# Altium PCB PCB_WashVer2.PcbDoc
Units mm, origin at the board's own origin, x right, y up, seen from the top; angles counter-clockwise.
Board outline 148 x 116 mm, 2 copper layers (Top Layer, Bottom Layer); 83 components, 92 nets, 296 pads, 72 vias.
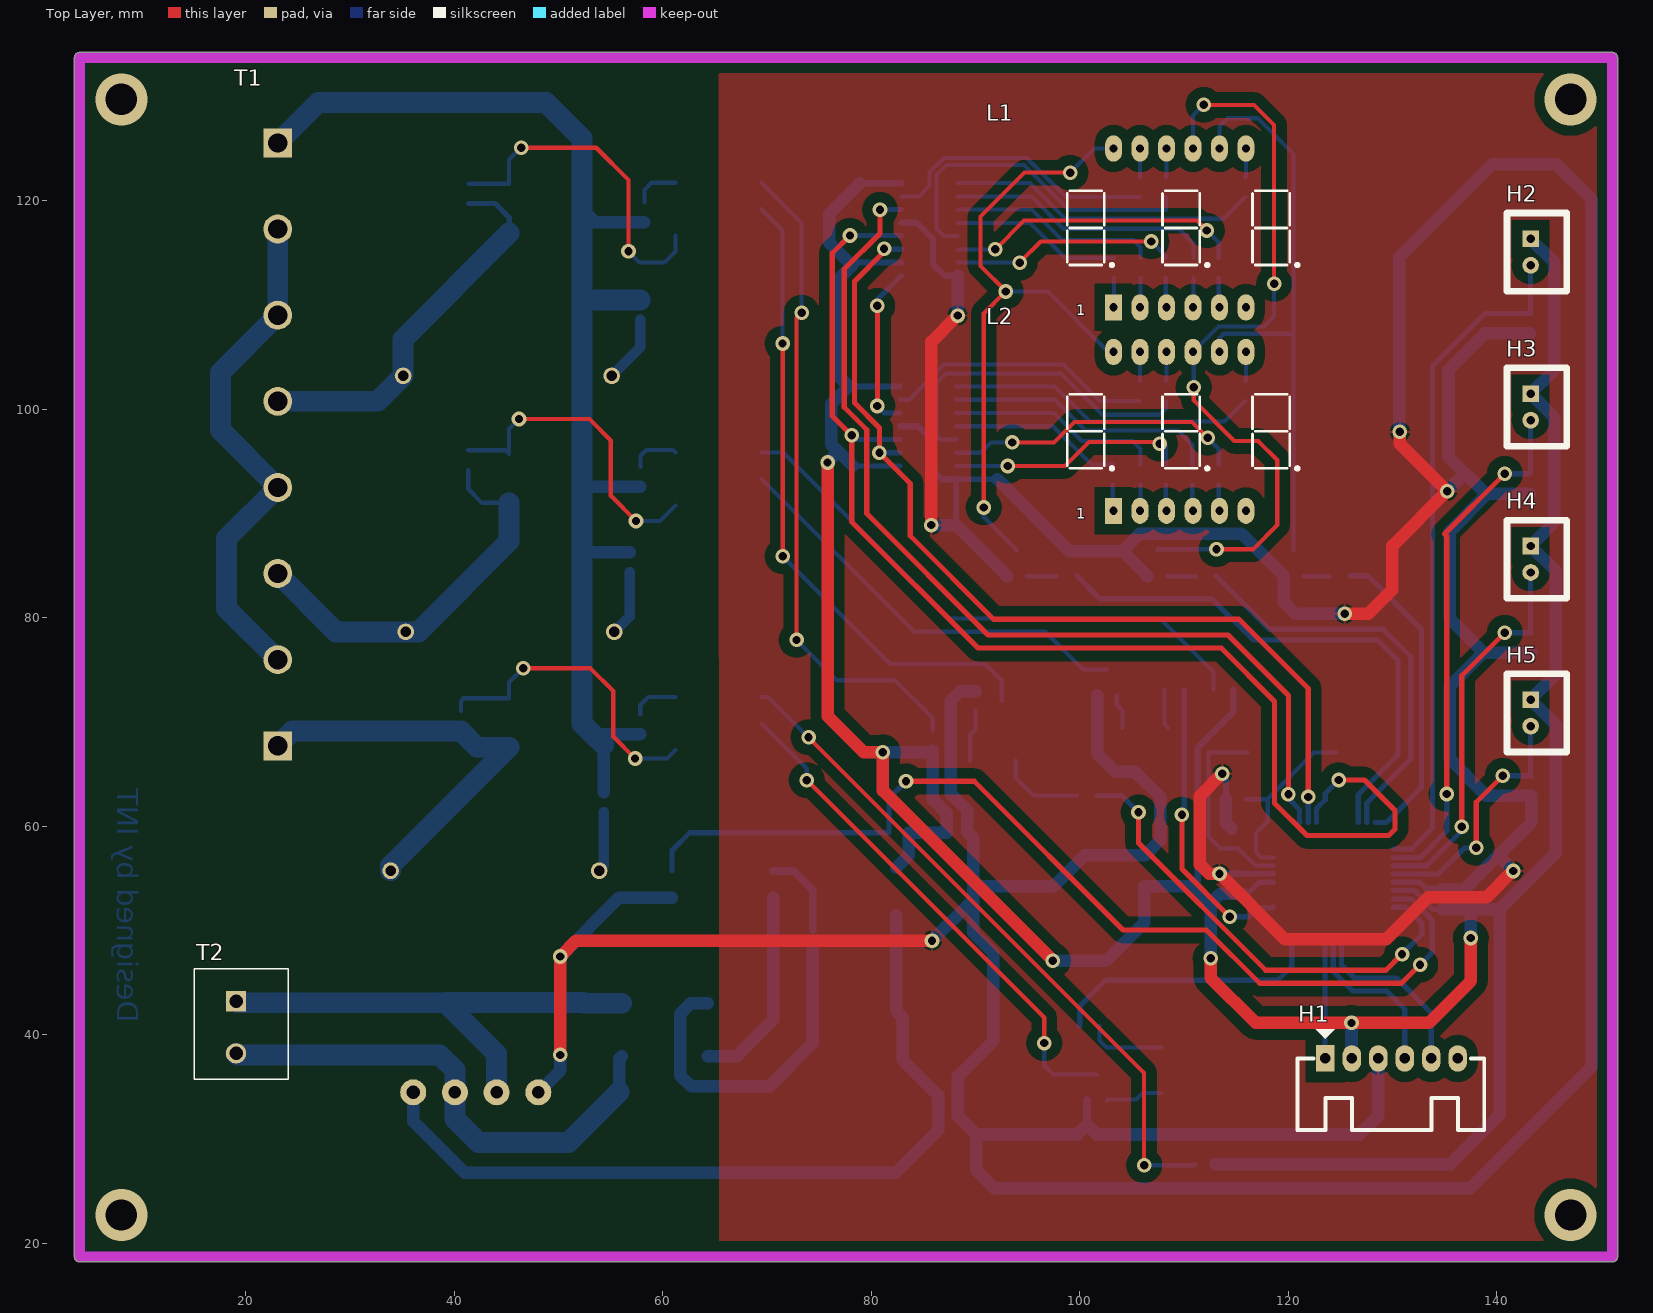
[diagram p0: Top Layer view]
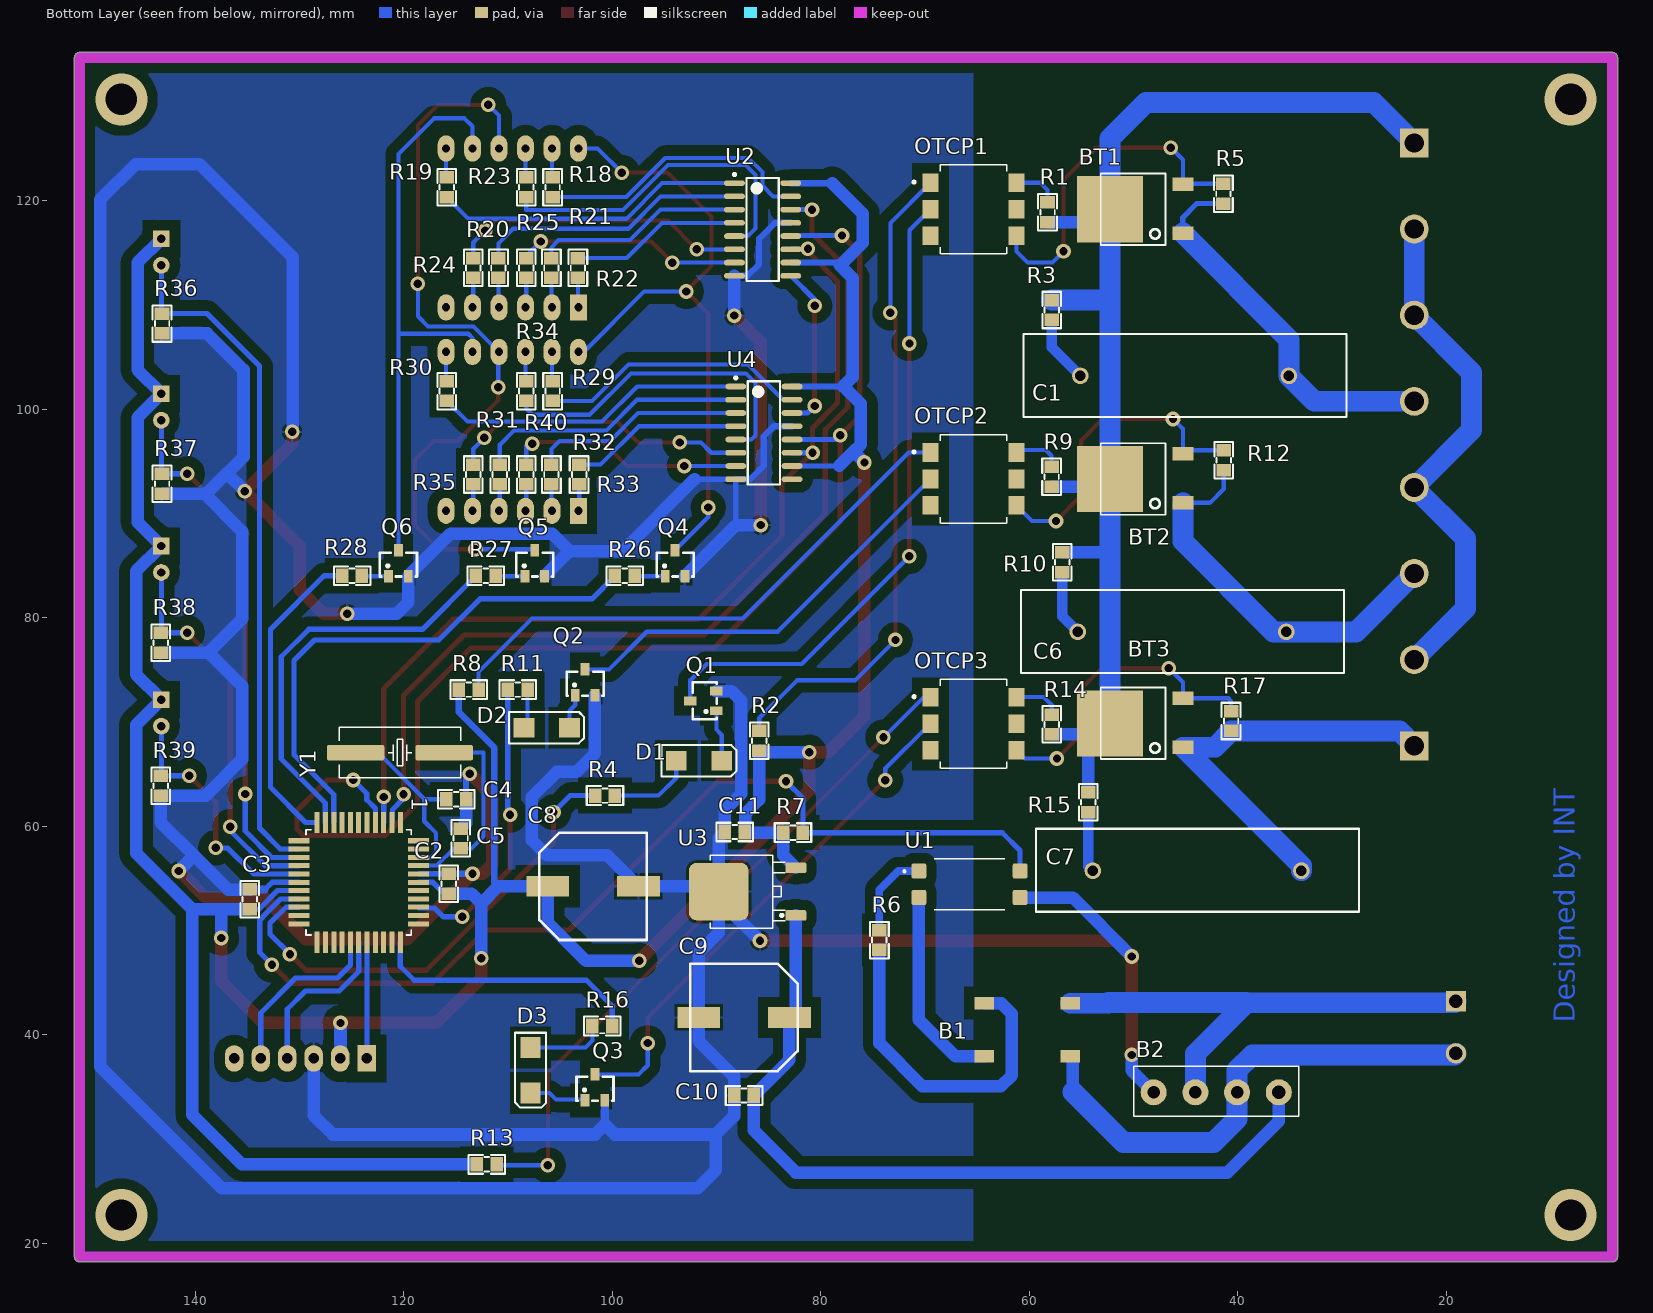
[diagram p1: Bottom Layer view, seen from below]

## Layer stack, top to bottom
Top Solder: solder mask 0.0102, Solder Resist, Dk 3.5
Top Layer: signal copper 0.0356
Dielectric 1: dielectric 0.32, FR-4, Dk 4.8
Bottom Layer: signal copper 0.0356
Bottom Solder: solder mask 0.0102, Solder Resist, Dk 3.5

## Board outline
3.58,18.7 3.58,133.7 cw(c4.08,133.7) 4.08,134.2 151.08,134.2 cw(c151.08,133.7) 151.58,133.7 151.58,18.7 cw(c151.08,18.7) 151.08,18.2 4.08,18.2 cw(c4.08,18.7)

## Design rules (kind name [scope] priority, off if disabled: settings)
Clearance Clearance_Mass [All vs InPolygon] p1: gap=1 ignorepadtopadclearanceinfootprint=FALSE
Clearance [All] p2: gap=0.26 ignorepadtopadclearanceinfootprint=FALSE
PolygonConnect [All] p1: connectstyle=Relief reliefconductorwidth=0.254 reliefentries=4 polygonreliefangle="90 Angle" airgapwidth=0.254
RoutingVias [InNetClass('PowerAC')] p1: holewidth=0.6 width=1 viastyle="Through Hole" minholewidth=0.6 minwidth=1 maxholewidth=0.6 maxwidth=1
SilkToSilkClearance [IsText] p1: silktosilkclearance=0.254
SolderMaskExpansion [All] p1: expansion=0.102
Width Width_AC [InNetClass('PowerAC')] p1: maxlimit=2 minlimit=0.5 preferedwidth=1.2
Width Width_DC [InNetClass('PowerDC')] p2: maxlimit=1.2 minlimit=0.5 preferedwidth=0.75
Width Width_Signal [InNetClass('Signal')] p3: maxlimit=0.5 minlimit=0.5 preferedwidth=0.5
Width Width_All [All] p4: maxlimit=2 minlimit=0.4 preferedwidth=1
29 further rules are at their usual default settings.

## Components (designator, comment, footprint, x,y, rotation, side; value= is the part's Value field where it differs from the comment)
1 "PIC16F887-I/PT" QFP80P1200X1200X120-44N 124.317,54.605 r180 bottom
B1 "BridgeDiode" DIOB_DB107S 60.195,40.465 r90 bottom
B2 "BridgeDiode" KBP310 42.07,34.465 r0 bottom
BT1 "BT137S-600E" TO252_NEW 48.765,119.225 r90 bottom
BT2 "BT137S-600E" TO252_NEW 48.765,93.355 r90 bottom
BT3 "BT137S-600E" TO252_NEW 48.765,69.915 r90 bottom
C1 "Tu keo 100nF 2000V" "TU KEO 25MM" 55.1,103.18 r180 bottom
C2 "104" "tu 0805" 115.681,54.478 r90 bottom
C3 "104" "tu 0805" 134.763,52.97 r90 bottom
C4 "22pF" "tu 0805" 114.963,62.57 r0 bottom
C5 "22pF" "tu 0805" 114.538,58.82 r270 bottom
C6 "Tu keo 100nF 2000V" "TU KEO 25MM" 55.35,78.63 r180 bottom
C7 "Tu keo 100nF 2000V" "TU KEO 25MM" 53.9,55.72 r180 bottom
C8 "1000uF" "tu nhom 10 (G)" 101.838,54.224 r180 bottom
C9 "1000uF" "tu nhom 10 (G)" 87.36,41.651 r0 bottom
C10 "104" "tu 0805" 87.36,34.158 r0 bottom
C11 "104" "tu 0805" 88.249,59.431 r0 bottom
D1 "SS14" "DIODE SMD" 91.678,66.162 r0 bottom
D2 "SS14" "DIODE SMD" 106.283,69.337 r0 bottom
D3 "SS14" "DIODE SMD" 107.934,36.571 r90 bottom
H1 "Header 6P 2.54 Duc Cong" "Header 6P DC 2.54" 123.555,37.714 r270 top
H2 "Header 2P 2.54 Duc Thang" XH2.54M-2 143.24,116.327 r270 top
H3 "Header 2P 2.54 Duc Thang" XH2.54M-2 143.24,101.468 r270 top
H4 "Header 2P 2.54 Duc Thang" XH2.54M-2 143.24,86.863 r270 top
H5 "Header 2P 2.54 Duc Thang" XH2.54M-2 143.24,72.131 r270 top
L1 "7SEG3DIG_0.56INCH" 7SEG_3DIGIT_0.56INCH 90.789,107.868 r0 top
L2 "7SEG3DIG_0.56INCH" 7SEG_3DIGIT_0.56INCH 90.789,88.36 r0 top
OTCP1 "OptoCouple" OPTOCOUPLER_H11F3SR2M 65.354,119.162 r180 bottom
OTCP2 "OptoCouple" OPTOCOUPLER_H11F3SR2M 65.354,93.291 r180 bottom
OTCP3 "OptoCouple" OPTOCOUPLER_H11F3SR2M 65.354,69.809 r180 bottom
Q1 "C1815" SOT23B 91.135,72.14 r90 bottom
Q2 "C1815" SOT23B 102.473,73.655 r180 bottom
Q3 "C1815" SOT23B 101.53,34.81 r180 bottom
Q4 "C1815" SOT23B 93.837,85.082 r180 bottom
Q5 "C1815" SOT23B 107.299,85.082 r180 bottom
Q6 "C1815" SOT23B 120.38,85.082 r180 bottom
R1 "330R" "Tro SMD 0805" 58.19,118.87 r270 bottom
R2 "470R" "Tro SMD 0805" 85.963,68.194 r90 bottom
R3 "390R" "Tro SMD 0805" 57.78,109.5 r270 bottom
R4 "680R" "tro smd 0805" 100.695,62.987 r180 bottom
R5 "330R" "Tro SMD 0805" 41.325,120.655 r270 bottom
R6 "220R" "tro smd 0805" 74.445,49.065 r90 bottom
R7 "1k" "tro smd 0805" 82.661,59.304 r0 bottom
R8 "470R" "Tro SMD 0805" 113.776,73.147 r180 bottom
R9 "330R" "Tro SMD 0805" 57.795,93.505 r270 bottom
R10 "390R" "Tro SMD 0805" 56.78,85.3 r270 bottom
R11 "680R" "tro smd 0805" 109.077,73.147 r180 bottom
R12 "330R" "Tro SMD 0805" 41.29,95.095 r270 bottom
R13 "470R" "Tro SMD 0805" 112.038,27.62 r180 bottom
R14 "330R" "Tro SMD 0805" 57.785,69.75 r270 bottom
R15 "390R" "Tro SMD 0805" 54.28,62.3 r270 bottom
R16 "680R" "tro smd 0805" 100.949,40.762 r0 bottom
R17 "330R" "Tro SMD 0805" 40.585,70.08 r270 bottom
R18 "100R" "tro smd 0805" 105.775,121.28 r90 bottom
R19 "100R" "tro smd 0805" 115.935,121.28 r90 bottom
R20 "100R" "tro smd 0805" 110.855,113.533 r270 bottom
R21 "100R" "tro smd 0805" 105.775,113.533 r270 bottom
R22 "100R" "tro smd 0805" 103.235,113.533 r270 bottom
R23 "100R" "tro smd 0805" 108.315,121.28 r90 bottom
R24 "100R" "tro smd 0805" 113.268,113.533 r270 bottom
R25 "100R" "tro smd 0805" 108.188,113.533 r270 bottom
R26 "1k" "tro smd 0805" 98.79,83.942 r0 bottom
R27 "1k" "tro smd 0805" 112.125,83.942 r0 bottom
R28 "1k" "tro smd 0805" 124.952,83.942 r0 bottom
R29 "100R" "tro smd 0805" 105.775,101.722 r90 bottom
R30 "100R" "tro smd 0805" 115.935,101.722 r90 bottom
R31 "100R" "tro smd 0805" 110.728,93.721 r270 bottom
R32 "100R" "tro smd 0805" 105.775,93.721 r270 bottom
R33 "100R" "tro smd 0805" 103.108,93.721 r270 bottom
R34 "100R" "tro smd 0805" 108.315,101.722 r90 bottom
R35 "100R" "tro smd 0805" 113.268,93.721 r270 bottom
R36 "1k" "tro smd 0805" 143.24,108.199 r90 bottom
R37 "1k" "tro smd 0805" 143.24,92.832 r90 bottom
R38 "1k" "tro smd 0805" 143.367,77.592 r90 bottom
R39 "1k" "tro smd 0805" 143.367,63.876 r90 bottom
R40 "100R" "tro smd 0805" 108.188,93.721 r270 bottom
T1 "CON-8" TER_8P_8.25 27.605,130.366 r270 top
T2 "12VAC" CON_2P_5mm 19.08,40.7 r270 top
U1 "EL817S(D)(TU)" SOIC254P1030X460-4N 65.735,54.415 r180 bottom
U2 "74HC595" "sop 16" 85.582,117.22 r180 bottom
U3 "78M05 SMD TO252" TO252 86.09,53.716 r90 bottom
U4 "74HC595" "sop 16" 85.455,97.712 r180 bottom
Y1 "16Mhz" "Thach Anh 2 chan SMD" 120.363,67.045 r0 bottom value=4Mhz

## Footprints (in the part's own frame and the unit in brackets; to place one, negate y for a bottom-side part, rotate by r counter-clockwise, add the part's x,y. Pads: shape width x height; smd on the part's side, far side on the other; paste and mask are expansions set on the pad)
7SEG_3DIGIT_0.56INCH [mm]
  rect 1.6x2.5 hole 0.8: 1(12.45,1.88)
  oval 1.6x2.5 hole 0.8: 2(14.99,1.88) 3(17.53,1.88) 4(20.07,1.88) 5(22.61,1.88) 6(25.15,1.88) 7(25.15,17.12) 8(22.61,17.12) 9(20.07,17.12) 10(17.53,17.12) 11(14.99,17.12) 12(12.45,17.12)
  silkscreen extent 8,5.79 30.23,13.06, body extent -0.01,0 37.59,19, height 8.05
CON_2P_5mm [mm]
  rect 1.95x1.95 hole 1.3: 1(-2.5,0)
  round 1.95 hole 1.3: 2(2.5,0)
  silkscreen extent -5.6,-4 5,5, body extent -5.6,-3.93 5,5.07, height 12.6
DIOB_DB107S [mm]
  rect 1.2x1.9 smd: +(2.55,4.126) -(-2.55,4.126) ~(2.55,-4.124) ~.(-2.55,-4.124)
  body extent -4.16,-5.2 4.16,5.2, height 2.58
"DIODE SMD" [mm]
  rect 2x1.9 smd: 1(2.184,-0.102) 2(-2.184,-0.102)
  silkscreen extent -3.58,-1.6 3.61,1.4, body extent -2.67,-1.5 2.82,1.3, height 2.3
"Header 6P DC 2.54" [mil]
  rect 100x70 hole 40: 1(0,0)
  oval 100x70 hole 40: 2(0,100) 3(0,200) 4(0,300) 5(0,400) 6(0,500)
  silkscreen extent -110,-105 270,600, body extent -7,-110 278,605, height 227
KBP310 [mm]
  round 2.5 hole 1.2: +(6,0) ~(-2,0) ~.(2,0)
  round 2.5 hole 1.3: -(-6,0)
  silkscreen extent -7.9,-2.5 7.9,2.3
OPTOCOUPLER_H11F3SR2M [mm]
  rect 1.52x1.78 smd: 1(-4.125,2.54) 2(-4.125,0) 3(-4.125,-2.54) 4(4.125,-2.54) 5(4.125,0) 6(4.125,2.54)
  silkscreen extent -5.8,-4.26 3.18,4.26, body extent -4.59,-4.25 4.58,4.26, height 4.94
QFP80P1200X1200X120-44N [mil]
  rect 80x19 smd: 1(-226,157) 2(-226,126) 3(-226,94) 4(-226,63) 5(-226,31) 6(-226,0) 7(-226,-31) 8(-226,-63) 9(-226,-94) 10(-226,-126) 11(-226,-157) 23(226,-157) 24(226,-126) 25(226,-94) 26(226,-63) 27(226,-31) 28(226,0) 29(226,31) 30(226,63) 31(226,94) 32(226,126) 33(226,157)
  rect 19x80 smd: 12(-157,-226) 13(-126,-226) 14(-94,-226) 15(-63,-226) 16(-31,-226) 17(0,-226) 18(31,-226) 19(63,-226) 20(94,-226) 21(126,-226) 22(157,-226) 34(157,226) 35(126,226) 36(94,226) 37(63,226) 38(31,226) 39(0,226) 40(-31,226) 41(-63,226) 42(-94,226) 43(-126,226) 44(-157,226)
  silkscreen extent -199,-199 199,199, body extent -236,-236 236,236, height 43
SOIC254P1030X460-4N [mm]
  rrect25% 1.41x1.47 smd: 1(-4.85,1.27) 2(-4.85,-1.27) 3(4.85,-1.27) 4(4.85,1.27)
  silkscreen extent -6.35,-2.44 3.4,2.44, body extent -5.08,-2.29 5.08,2.29, height 4.43
"sop 16" [mm] "SOIC, 16-Leads, Body 9.90x3.91mm, Pitch 1.27mm, IPC Medium Density"
  oval 2x0.55 smd: 1(-2.7,4.445) 2(-2.7,3.175) 3(-2.7,1.905) 4(-2.7,0.635) 5(-2.7,-0.635) 6(-2.7,-1.905) 7(-2.7,-3.175) 8(-2.7,-4.445) 9(2.7,-4.445) 10(2.7,-3.175) 11(2.7,-1.905) 12(2.7,-0.635) 13(2.7,0.635) 14(2.7,1.905) 15(2.7,3.175) 16(2.7,4.445)
  silkscreen extent -2.83,-4.95 1.55,5.39, body extent -3,-4.95 3,4.95, height 1.4
SOT23B [mm] "SOT 23B"
  rect 0.85x1.2 smd: 1(-1.077,-1.123) 2(0.813,-1.118) 3(-0.127,1.377)
  silkscreen extent -1.91,-1.14 1.65,1.14, body extent -1.63,-1.17 1.37,1.33, height 1.06
TER_8P_8.25 [mm]
  rect 2.775x2.775 hole 1.85: 1(4.846,-4.525) 8(62.666,-4.525)
  round 2.775 hole 1.85: 2(13.106,-4.525) 3(21.366,-4.525) 4(29.626,-4.525) 5(37.886,-4.525) 6(46.146,-4.525) 7(54.406,-4.525)
  body extent -0.43,-14.84 67.33,0.4, height 11.43
"Thach Anh 2 chan SMD" [mm] "SMD Crystal HC49/US-SM package"
  round 0.508 on Mech15: 0(0,0)
  rrect25% 5.5x1.5 smd: 1(-4.25,0) 2(4.25,0)
  silkscreen extent -5.84,-2.41 5.84,2.41, body extent -6.4,-2.41 6.4,2.42, height 4.29
TO252 [mm] "TO252"
  round 0.5 on Mech15: 0(0,0)
  rrect25% 1x2 smd: 1(-2.285,-3.7) 3(2.285,-3.7)
  rrect25% 5.5x5.7 smd: 2(0,3.7)
  silkscreen extent -3.5,-2.7 3.5,4.5, body extent -3.3,-3.95 3.3,5.76, height 2.31
TO252_NEW [mil]
  rect 51.18x78.74 smd: 1(-92.5,-137.5) 3(92.5,-137.5)
  rect 250x250 smd: 2(-2.5,137.5)
  silkscreen extent -138,-73 132,172, body extent -132,-163 127,219, height 91
"Tro SMD 0805" [mm]
  rect 1.2x1.4 smd: 1(-0.946,-0.061) 2(0.954,-0.061)
  silkscreen extent -1.75,-0.97 1.75,0.84, body extent -1.56,-0.76 1.44,0.64, height 0.53
"tro smd 0805" [mm]
  rect 1.2x1.4 smd: 1(-0.946,-0.061) 2(0.954,-0.061)
  silkscreen extent -1.75,-0.97 1.75,0.84, body extent -1.56,-0.76 1.44,0.64, height 0.53
"tu 0805" [mm] "Compoment SMD 80x50mil"
  rect 1.2x1.4 smd: 1(-0.946,-0.003) 2(0.954,-0.003)
  silkscreen extent -1.75,-0.89 1.75,0.89, body extent -1.01,-0.64 1.01,0.63, height 0.61
"TU KEO 25MM" [mm]
  round 1.6 hole 1: 1(0,0) 2(20,0)
  silkscreen extent -5.46,-3.94 25.53,4.02, body extent -5.47,-3.96 25.53,4.04, height 22.5
"tu nhom 10 (G)" [mm]
  rect 4.1x2 smd: 1(-4.35,0) 2(4.35,0)
  silkscreen extent -5.15,-5.15 5.15,5.15, body extent -5.9,-5.25 5.9,5.25, height 10.5
XH2.54M-2 [mm]
  rect 1.6x1.6 hole 0.8: 1(0,0)
  round 1.6 hole 0.8: 2(2.54,0)
  silkscreen extent -2.48,-2.26 5.02,3.46, body extent -2.48,-2.26 5.02,3.48, height 6.91

## Part data
1: "PIC PIC® 16F Microcontroller IC 8-Bit 20MHz 14KB _8K x 14_ FLASH 44-TQFP _10x10_", Package="TQFP-44 Microchip", Availability=Unavailable, MF=Microchip, MP=PIC16F887-I/PT, Price=None, SnapEDA_Link=https://www.snapeda.com/parts/PIC16F887-I/PT/Microchip/view-part/5739/?ref=snap
B1 B2: library part DIOB_Bridge
BT1 BT2 BT3: library part BT137, "Dán", Chung_Loai=Dán, Don_Vi=Con, Ma_Hang=MH005450, Ten_Linh_Kien="BT137S-600E TO252 TRIAC 8A 600V"
C2 C3 C10 C11: library part "Tu 0805 104 50V 10%", "Dán", Chung_Loai=Dán, Don_Vi=Con, Ma_Hang=MH004551, So_Chan=2, Ten_Linh_Kien="T? 0805 104-100nF 10% 50V"
C4 C5: library part "Tu 0805 22pF 50V 10%", "Dán", Chung_Loai=Dán, Don_Vi=Con, Ma_Hang=MH004560, So_Chan=2, Ten_Linh_Kien="T? 0805 22P 10% 50V"
C8 C9: library part "Tu Nhom 1000uF 16V", "Dán", Chung_Loai=Dán, Don_Vi=Con, Ma_Hang=MH004419, So_Chan=2, Ten_Linh_Kien="T? Nhôm 1000uF 16V 10x10MM"
D1 D2 D3: library part "Diode SS14 ( 1N5819)", "Dán", Chung_Loai=Dán, Don_Vi=Con, Ma_Hang=MH002211, Ten_Linh_Kien="Diode SS14 DO214 Schottky 1A 40V ( 1N5819 DO214)"
H1 H2 H3 H4 H5: "C?m", Chung_Loai=C?m, Don_Vi=Con
  H1: Ma_Hang=MH003363, Ten_Linh_Kien="Header 6P XH2.54-6P Ð?c Cong"
  H2 H3 H4 H5: Ma_Hang=MH001283, Ten_Linh_Kien="Header 2P XH2.54-2P Ð?c Th?ng"
OTCP1 OTCP2 OTCP3: library part MOC3020SM
Q1 Q2 Q3 Q4 Q5 Q6 U2 U3 U4: "Dán", Chung_Loai=Dán, Don_Vi=Con
  Q1 Q2 Q3 Q4 Q5 Q6: Ma_Hang=MH000946, Ten_Linh_Kien="C1815 SOT23 TRANS NPN 0.15A 50V (SMD-HF)"
  U2 U4: Ma_Hang=MH000672, Ten_Linh_Kien="74HC595D SOP16"
  U3: Ma_Hang=MH001917, Ten_Linh_Kien="78M05 TO252"
R1 R5 R9 R12 R14 R17: library part "Tro 0805 5% 330R", "Dán", Chung_Loai=Dán, Don_Vi=Con, Ma_Hang=MH005337, So_Chan=2, Ten_Linh_Kien="Tr? 0805 5% 330R"
R2 R8 R13: library part "Tro 0805 5% 470R", "Dán", Chung_Loai=Dán, Don_Vi=Con, Ma_Hang=MH005341, So_Chan=2, Ten_Linh_Kien="Tr? 0805 5% 470R"
R3 R10 R15: library part "Tro 0805 5% 390R", "Dán", Chung_Loai=Dán, Don_Vi=Con, Ma_Hang=MH005339, So_Chan=2, Ten_Linh_Kien="Tr? 0805 5% 390R"
R4 R11 R16: library part "Tro 0805 1% 680R", "Dán", Chung_Loai=Dán, Don_Vi=Con, Ma_Hang=MH005487, So_Chan=2, Ten_Linh_Kien="Tr? 0805 1% 680R"
R6: library part "Tro 0805 5% 220R", "Dán", Chung_Loai=Dán, Don_Vi=Con, Ma_Hang=MH005259, So_Chan=2, Ten_Linh_Kien="Tr? 0805 5% 220R"
R7 R26 R27 R28 R36 R37 R38 R39: library part "Tro 0805 1% 1k", "Dán", Chung_Loai=Dán, Don_Vi=Con, Ma_Hang=MH005468, So_Chan=2, Ten_Linh_Kien="Tr? 0805 1% 1k"
R18 R19 R20 R21 R22 R23 R24 R25 R29 R30 R31 R32 R33 R34 R35 R40: library part "Tro 0805 5% 100R", "Dán", Chung_Loai=Dán, Don_Vi=Con, Ma_Hang=MH005251, So_Chan=2, Ten_Linh_Kien="Tr? 0805 5% 100R"
T2: library part CONNECT
U1: "Optoisolator Transistor Output 5000Vrms 1 Channel 4-SMD", Package="SMD-4 Everlight Electronics", Availability=Unavailable, MF="Everlight Electronics", MP=EL817S_D__TU_, Price=None, SnapEDA_Link=https://www.snapeda.com/parts/EL817S_D__TU_/Everlight%20Electronics%20Co%20Ltd/view-part/1118456/?ref=snap
Y1: library part "Thach Anh 2 chan SMD", "Crystal For all Crystal 2pin."

## Via types
v1: diameter 1.4, hole 0.8, Top Layer to Bottom Layer, 68 vias
v2: diameter 5, hole 3, Top Layer to Bottom Layer, 4 vias

## Nets (pads, with @x,y where several pads share a name; then routed paths per layer and width w, separated by ;. In a path a pad name is that pad's centre, name@x,y a point inside that pad or via, vN(x,y) a via of type N, cw(c..) or ccw(c..) an arc to the next point about the centre after c; other vN are vias at no path point)
5V: 1.7 1.28 C2.1 C3.1 C8.1 C11.1 H1.2 H2.1 H3.1 H4.1 H5.1 R2.1 R7.2 R8.1 R13.1 U2.10 U2.16 U3.3 U4.10 U4.16 | length 364.5
  Top Layer w1.2: v1(75.813,94.87) 75.813,70.545 79.263,67.095 v1(81.113,67.095) 81.113,63.395 v1(97.413,47.095) ; v1(112.563,47.32) 112.563,45.445 116.888,41.12 v1(126.063,41.12) 133.488,41.12 137.513,45.145 v1(137.513,49.27)
  Bottom Layer w0.5: 78.246,94.537 U4.10 ; C2.1 116.132,53.532 117.205,54.605 1.28 ; 1.7 132.09,53.818 133.9,52.008 C3.1@134.744,52.008
  Bottom Layer w0.6: 77.825,102.158 77.85,102.158 U4.16 ; 78.443,114.05 U2.10@82.882,114.05 ; 78.908,121.665 U2.16 ; R2.1@85.749,67.095 R2.1 ; 110.934,54.224 111.313,54.603 111.313,67.536 114.722,70.945 R8.1
  Bottom Layer w0.75: 140.246,52.024 145.653,57.431
  Bottom Layer w1.2: v1(75.813,94.87) 75.823,94.87 76.868,95.915 ; 77.825,102.158 76.163,100.495 76.163,96.62 76.868,95.915 ; 77.85,102.158 76.938,103.07 76.938,112.545 78.161,113.769 75.988,115.942 75.988,118.745 78.908,121.665 ; 78.246,94.537 76.868,95.915 ; v1(81.113,67.095) R2.1@85.749,67.095 ; U3.3 83.615,57.226 R7.2 87.234,59.365 C11.1 87.234,59.504 87.234,61.208 85.902,62.54 R2.1 ; v1(97.413,47.095) 102.488,47.095 102.513,47.07 106.188,50.745 C8.1 110.934,54.224 112.563,52.595 ; v1(112.563,47.32) 112.563,52.595 ; R13.1 135.527,27.559 140.262,32.294 140.262,52.008 145.653,57.399 145.653,57.431 145.653,69.718 H5.1 145.653,74.544 145.653,84.45 H4.1 145.526,89.149 145.526,99.182 H3.1 145.526,103.754 145.526,114.041 H2.1 ; C2.1 113.5,53.532 112.563,52.595 ; v1(126.063,41.12) 126.063,37.746 H1.2 ; C3.1 137.513,52.024 ; v1(137.513,49.27) 137.513,52.024 ; 140.246,52.024 137.513,52.024
220V-L: BT1.2 BT2.2 BT3.2 R1.2 R3.1 R9.2 R10.1 R14.2 R15.1 T1.1 | length 123.1
  Bottom Layer w1.2: 52.257,86.4 52.412,86.246 R10.1 ; BT2.2 52.998,92.551 R9.2 ; BT1.2 53.503,117.916 R1.2 ; BT3.2@53.313,68.796 R14.2 ; R15.1 BT3.2@54.341,67.768
  Bottom Layer w2: T1.1 26.96,129.4 48.81,129.4 52.257,125.953 BT1.2 52.257,110.7 ; BT3.2@54.341,67.768 53.313,68.796 BT3.2 52.257,86.4 BT2.2 52.257,110.7 ; R3.1 52.512,110.446 52.257,110.7
220V-N: T1.2 T1.3 T1.5 T1.7 | length 49.9
  Bottom Layer w2: T1.7 18.18,80.86 18.18,87.58 T1.5 17.58,97.98 17.58,103.5 T1.3 T1.2
AC1: B1.~ B2.~. T2.1 | length 47.7
  Bottom Layer w2: T2.1 19.225,43.055 39.175,43.055 ; B2.~. 44.07,38.16 39.175,43.055 ; B1.~ 52.44,43.015 52.39,43.065 39.165,43.065 39.175,43.055
AC2: B1.~. B2.~ T2.2 | length 48.6
  Bottom Layer w1.2: 55.825,34.49 55.825,37.669 B1.~.
  Bottom Layer w2: T2.2 19.225,38.055 38.61,38.055 40.07,36.595 B2.~ 40.07,31.895 42.325,29.64 50.975,29.64 55.825,34.49
C1: L1.12 L2.12 Q4.3 | length 63.4
  Top Layer w0.4: v1(90.79,90.56) 90.79,109.172 v1(92.888,111.27) ; v1@92.963,111.245 90.488,113.72 90.488,118.47 94.688,122.67 v1(99.088,122.67)
  Bottom Layer w0.4: v1(90.79,90.56) 90.79,89.633 Q4.3 ; v1(92.888,111.27) 96.938,111.27 102.728,105.48 L2.12 ; v1(99.088,122.67) 101.406,124.988 L1.12
C2: L1.9 L2.9 Q5.3 | length 73.5
  Top Layer w0.4: v1(110.938,102.095) 110.938,100.82 114.813,96.945 117.113,96.945 118.938,95.12 118.938,88.87 116.613,86.545 v1(113.113,86.545) ; v1(111.888,129.17) 116.713,129.17 118.638,127.245 v1(118.638,112.02)
  Bottom Layer w0.4: Q5.3 107.512,86.545 v1(113.113,86.545) ; L1.9 110.859,128.141 v1(111.888,129.17) ; v1(110.938,102.095) 110.938,105.401 L2.9 113.299,107.92 117.663,107.92 118.638,108.895 v1(118.638,112.02)
C3: L1.8 L2.8 Q6.3 | length 57.6
  Bottom Layer w0.4: L2.8 113.399,106.806 113.813,107.22 120.507,107.22 ; L1.8 113.399,127.126 114.157,127.884 117.078,127.884 120.507,124.455 120.507,107.22 ; Q6.3 120.507,107.22
DS1: 1.35 U2.14 | length 93.8
  Top Layer w0.5: v1(80.838,119.125) 80.838,116.845 77.413,113.42 77.413,100.17 79.563,98.02 79.563,89.97 91.213,78.32 114.213,78.32 120.013,72.52 v1(120.013,63.045)
  Bottom Layer w0.5: v1(80.838,119.125) U2.14 ; v1(120.013,63.045) 120.013,62.64 121.08,61.573 121.08,60.382 1.35
DS2: U2.9 U4.14 | length 15.9
  Top Layer w0.5: v1(80.563,109.895) 80.588,109.87 v1(80.588,100.295)
  Bottom Layer w0.5: v1(80.563,109.895) 80.563,110.456 U2.9 ; v1(80.588,100.295) 81.266,99.617 U4.14
GND: 1.6 1.29 B2.+ C2.2 C3.2 C4.1 C5.1 C8.2 C9.2 C10.2 C11.2 H1.3 Q1.2 Q2.2 Q3.2 Q4.2 Q5.2 Q6.2 R36.1 R37.1 R38.1 R39.1 U1.3 U2.8 U2.13 U3.2 U4.8 U4.13 | length 674
  Top Layer w1.2: v1(50.18,38.05) v1(50.18,47.495) 51.695,49.01 v1(85.825,49.01) ; v1(85.763,88.87) 85.763,106.445 v1(88.282,108.964) ; v1(113.663,65.02) 111.527,62.884 111.527,56.309 112.404,55.432 v1(113.4,55.432) 119.688,49.145 129.388,49.145 133.413,53.17 138.988,53.17 141.513,55.695 v1(141.588,55.695) v1@141.588,55.52 ; v1(125.413,80.37) 127.688,80.37 129.988,82.67 129.988,86.87 v1(135.238,92.12) 130.705,96.653 v1(130.705,97.805)
  Bottom Layer w0.5: 88.119,88.87 88.155,88.906 U4.8 92.091,93.267 ; C2.2 118.537,55.432 1.29 ; 1.6 132.634,54.605 133.331,53.908
  Bottom Layer w0.6: U4.13 84.511,98.347 85.463,97.395 85.463,94.57 86.766,93.267 U4.8 ; U2.13 84.377,117.855 85.913,116.32 85.913,113.895 87.032,112.775 U2.8 ; v1@88.282,108.876 v1(88.282,108.964) ; v1(113.4,55.432) C2.2 ; v1(113.663,65.02) 114.017,64.666 C4.1
  Bottom Layer w0.75: 100.695,31.364 100.695,33.67 Q3.2 ; 133.331,53.908 C3.2@134.776,53.908
  Bottom Layer w1.2: B2.+ 50.18,36.575 v1(50.18,38.05) ; v1(50.18,47.495) 55.83,53.145 U1.3 ; v1(85.763,88.87) 88.119,88.87 Q4.2 ; v1(85.825,49.01) U3.2@89.79,52.975 ; v1(88.282,108.964) U2.8 ; Q1.2 88.568,72.953 87.614,71.999 87.614,63.114 89.203,61.525 C11.2 89.79,58.848 U3.2 ; 92.091,93.267 98.988,86.37 104.081,86.37 ; Q2.2 101.66,66.97 103.44,65.19 105.32,65.19 107.72,62.79 107.72,58.645 106.3,57.225 100.489,57.225 C8.2 90.298,54.224 U3.2 ; Q5.2 104.081,86.37 ; C4.1 114.017,60.29 C5.1 ; v1(125.413,80.37) 120.663,80.37 119.567,81.466 Q6.2 115.492,88.04 112.494,88.04 112.474,88.02 105.731,88.02 104.081,86.37 ; H1.3 128.635,32.253 126.802,30.42 101.639,30.42 100.695,31.364 99.751,30.42 90.082,30.42 ; v1(130.705,97.805) 130.66,97.85 130.66,114.56 139.6,123.5 145.7,123.5 149.11,120.09 149.11,36.925 137.47,25.285 91.782,25.285 90.082,26.985 90.082,30.42 ; C3.2 134.776,53.908 136.851,53.908 140.113,57.17 ; v1(135.238,92.12) 136.95,93.833 135.366,95.417 135.366,103.754 138.865,107.253 R36.1 ; 137.13,93.653 138.897,91.886 139.106,91.886 ; v1(141.588,55.695) 140.113,57.17 ; R37.1 139.106,91.886 ; R38.1 138.725,76.646 ; U3.2@89.79,52.975 89.79,49.762 91.71,47.842 C9.2 91.71,39.397 88.314,36.001 C10.2 88.314,32.188 90.082,30.42 ; U3.2@89.79,52.975 U3.2 ; 138.725,76.646 135.493,73.415 135.493,66.416 138.979,62.93 R39.1 143.306,60.363 140.113,57.17 ; 138.725,76.646 135.493,79.878 135.493,88.274 139.106,91.886
LED1: 1.42 R26.2 | length 51.3
  Bottom Layer w0.5: R26.2 101.952,81.795 112.688,81.795 116.638,77.845 128.563,77.845 130.513,75.895 130.513,66.845 126.705,63.037 1.42
LED2: 1.43 R27.2 | length 39.5
  Bottom Layer w0.5: R27.2 118.212,78.87 129.113,78.87 131.738,76.245 131.738,66.445 127.517,62.224 1.43
LED3: 1.44 R28.2 | length 30
  Bottom Layer w0.5: R28.2 127.63,84.003 132.788,78.845 132.788,63.72 129.413,60.345 1.44
LED7_A1: R18.1 U2.15 | length 26.7
  Bottom Layer w0.4: U2.15 84.563,120.395 85.603,121.435 85.603,122.718 86.965,124.08 94.911,124.08 98.657,120.334 R18.1
LED7_A2: R29.1 U4.15 | length 25.8
  Bottom Layer w0.4: U4.15 83.605,100.887 86.988,104.27 98.438,104.27 101.932,100.776 R29.1
LED7_B1: R19.1 U2.1 | length 29.9
  Bottom Layer w0.4: U2.1 95.229,121.665 98.65,118.245 113.785,118.245 R19.1
LED7_B2: R30.1 U4.1 | length 29.9
  Bottom Layer w0.4: U4.1 97.601,102.157 100.963,98.795 113.893,98.795 R30.1
LED7_C1: R20.1 U2.2 | length 25.9
  Bottom Layer w0.4: U2.2 95.356,120.395 98.457,117.295 109.506,117.295 110.916,115.885 R20.1
LED7_C2: R31.1 U4.2 | length 26.3
  Bottom Layer w0.4: U4.2 97.621,100.887 100.563,97.945 109.413,97.945 110.789,96.569 R31.1
LED7_D1: R21.1 U2.3 | length 20.1
  Bottom Layer w0.4: U2.3 95.356,119.125 98.282,116.2 105.14,116.2 105.836,115.504 R21.1
LED7_D2: R32.1 U4.3 | length 20.6
  Bottom Layer w0.4: U4.3 97.516,99.617 100.188,96.945 105.063,96.945 105.836,96.172 R32.1
LED7_E1: R22.1 U2.4 | length 16.4
  Bottom Layer w0.4: U2.4 95.229,117.855 98.606,114.479 R22.1
LED7_E2: R33.1 U4.4 | length 16.5
  Bottom Layer w0.4: U4.4 97.436,98.347 101.116,94.667 R33.1
LED7_F1: R23.1 U2.5 | length 32.9
  Bottom Layer w0.4: U2.5 86.997,116.585 86.263,117.32 86.263,122.445 87.238,123.42 94.638,123.42 98.972,119.086 108.254,119.086 R23.1
LED7_F2: R34.1 U4.5 | length 32.1
  Bottom Layer w0.4: U4.5 86.631,97.077 86.263,97.445 86.263,102.495 87.188,103.42 98.213,103.42 102.178,99.455 107.673,99.455 108.254,100.036 R34.1
LED7_G1: R24.1 U2.6 | length 28.4
  Top Layer w0.4: v1(91.908,115.315) 94.663,118.07 111.238,118.07 v1@112.113,117.195
  Bottom Layer w0.4: U2.6 v1(91.908,115.315) ; v1(112.188,117.12) 113.329,115.979 R24.1
LED7_G2: R35.1 U4.6 | length 29
  Top Layer w0.4: v1(93.513,96.795) 97.538,96.795 99.488,98.745 110.763,98.745 v1(112.263,97.245)
  Bottom Layer w0.4: U4.6 90.5,95.807 91.488,96.795 v1(93.513,96.795) ; v1(112.263,97.245) 113.329,96.179 R35.1
LED7_H1: R25.1 U2.7 | length 21.6
  Top Layer w0.4: v1(94.237,114.045) 96.262,116.07 v1(106.863,116.07)
  Bottom Layer w0.4: U2.7 v1(94.237,114.045) ; v1(106.863,116.07) 108.249,114.684 R25.1
LED7_H2: R40.1 U4.7 | length 23.5
  Top Layer w0.4: v1(93.105,94.537) 98.58,94.537 100.888,96.845 107.513,96.845 v1(107.688,96.67)
  Bottom Layer w0.4: U4.7 v1(93.105,94.537) ; v1(107.688,96.67) 107.688,97.045 108.249,96.484 R40.1
MCLR: 1.18 H1.1 | length 11.2
  Bottom Layer w0.5: 1.18 123.53,37.739 H1.1
MOTOR2: BT1.1 C1.2 R5.2 T1.4 | length 36.9
  Bottom Layer w0.5: R5.2 43.939,119.701 45.272,118.368 BT1.1
  Bottom Layer w2: T1.4 32.66,100.74 C1.2 35.08,103.2 35.08,106.683 BT1.1
Net1_30: 1.30 C5.2 Y1.1 | length 19.2
  Bottom Layer w0.4: Y1.1 112.338,67.045 112.338,59.02 113.492,57.866 C5.2 115.195,57.866 116.855,56.205 1.30
Net1_31: 1.31 C4.2 Y1.2 | length 18
  Bottom Layer w0.4: C4.2 118.035,62.573 ; 1.31 117.39,56.993 116.888,57.495 116.888,59.32 118.035,60.467 118.035,62.573 ; Y1.2 122.464,67.045 118.035,62.615 118.035,62.573
NetB1_+: B1.+ R6.1 | length 32.8
  Bottom Layer w1.2: B1.+ 62.695,43.015 61.68,42 61.68,36.1 62.74,35.04 70.245,35.04 74.384,39.179 R6.1
NetB1_-: B1.- U1.2 | length 19.4
  Bottom Layer w1.2: B1.- 67.075,37.915 70.585,41.425 U1.2
NetB2_-: B2.- C9.1 C10.1 U3.1 | length 79.1
  Bottom Layer w1.2: B2.- 36.07,31.695 40.995,26.77 82.375,26.77 86.414,30.809 C10.1 83.01,37.566 C9.1 82.39,42.271 U3.1
NetBT1_3: BT1.3 OTCP1.4 R5.1 | length 33.2
  Top Layer w0.4: v1(46.425,125.06) 53.625,125.06 56.72,121.965 v1(56.72,115.12)
  Bottom Layer w0.4: R5.1 45.246,121.601 BT1.3 45.272,123.908 v1(46.425,125.06) ; v1(56.72,115.12) 57.79,114.05 60.165,114.05 61.229,115.114 OTCP1.4
NetBT2_3: BT2.3 OTCP2.4 R12.1 | length 30.6
  Top Layer w0.4: v1(46.215,99.045) 52.965,99.045 55.015,96.995 55.015,91.69 v1(57.44,89.265)
  Bottom Layer w0.4: R12.1 44.936,96.041 BT2.3 45.272,98.103 v1(46.215,99.045) ; v1(57.44,89.265) 59.743,89.265 OTCP2.4
NetBT3_3: BT3.3 OTCP3.4 R17.1 | length 30.2
  Top Layer w0.4: v1(46.61,75.13) 53.075,75.13 55.26,72.945 55.26,68.575 v1(57.35,66.485)
  Bottom Layer w0.4: R17.1 40.646,72.001 40.909,72.265 BT3.3 45.272,73.793 v1(46.61,75.13) ; v1(57.35,66.485) 60.403,66.485 OTCP3.4@61.229,67.312
NetC1_1: C1.1 R3.2 | length 6.5
  Bottom Layer w1: C1.1 57.841,105.921 R3.2
NetC6_1: C6.1 R10.2 | length 6.3
  Bottom Layer w1: C6.1 56.841,80.121 R10.2
NetC7_1: C7.1 R15.2 | length 5.8
  Bottom Layer w1: C7.1 54.341,56.161 R15.2
NetD1_1: D1.1 R4.2 | length 8.2
  Bottom Layer w0.4: D1.1 93.862,64.613 95.549,62.926 R4.2
NetD1_2: D1.2 Q1.1 | length 5
  Bottom Layer w0.4: D1.2 89.494,68.739 90.012,69.257 Q1.1
NetD2_1: D2.1 R11.2 | length 3.8
  Bottom Layer w0.4: R11.2 108.123,69.783 D2.1
NetD2_2: D2.2 Q2.1 | length 3.3
  Bottom Layer w0.4: Q2.1 103.55,71.61 104.099,71.061 D2.2
NetD3_1: D3.1 R16.2 | length 7.6
  Bottom Layer w0.4: R16.2 101.903,39.427 102.575,38.755 D3.1
NetD3_2: D3.2 Q3.1 | length 5.5
  Bottom Layer w0.4: Q3.1 102.697,33.777 105.394,33.777 106.004,34.387 D3.2
NetL1_1: L1.1 R22.2 | length 2.9
  Bottom Layer w0.4: L1.1 103.296,109.805 R22.2
NetL1_2: L1.2 R21.2 | length 2.9
  Bottom Layer w0.4: L1.2 105.836,109.805 R21.2
NetL1_3: L1.3 R25.2 | length 2.9
  Bottom Layer w0.4: R25.2 108.249,109.818 L1.3
NetL1_4: L1.4 R20.2 | length 2.9
  Bottom Layer w0.4: L1.4 110.916,109.805 R20.2
NetL1_5: L1.5 R24.2 | length 2.9
  Bottom Layer w0.4: R24.2 113.329,109.818 L1.5
NetL1_7: L1.7 R19.2 | length 2.8
  Bottom Layer w0.4: R19.2 115.939,122.299 L1.7
NetL1_10: L1.10 R23.2 | length 2.8
  Bottom Layer w0.4: R23.2 108.319,122.299 L1.10
NetL1_11: L1.11 R18.2 | length 2.8
  Bottom Layer w0.4: R18.2 105.779,122.299 L1.11
NetL2_1: L2.1 R33.2 | length 2.6
  Bottom Layer w0.4: R33.2 103.169,90.31 L2.1
NetL2_2: L2.2 R32.2 | length 2.6
  Bottom Layer w0.4: L2.2 105.836,90.297 R32.2
NetL2_3: L2.3 R40.2 | length 2.6
  Bottom Layer w0.4: R40.2 108.249,90.31 L2.3
NetL2_4: L2.4 R31.2 | length 2.6
  Bottom Layer w0.4: R31.2 110.789,90.31 L2.4
NetL2_5: L2.5 R35.2 | length 2.6
  Bottom Layer w0.4: R35.2 113.329,90.31 L2.5
NetL2_7: L2.7 R30.2 | length 2.8
  Bottom Layer w0.4: R30.2 115.939,102.741 L2.7
NetL2_10: L2.10 R34.2 | length 2.8
  Bottom Layer w0.4: R34.2 108.319,102.741 L2.10
NetL2_11: L2.11 R29.2 | length 2.8
  Bottom Layer w0.4: R29.2 105.779,102.741 L2.11
NetOTCP1_1: OTCP1.1 R2.2 | length 63
  Top Layer w0.4: v1(72.84,77.855) 72.84,108.76 v1(73.325,109.245)
  Bottom Layer w0.4: OTCP1.1 73.325,117.856 v1(73.325,109.245) ; v1(72.84,77.855) 76.715,73.98 82.295,73.98 85.902,70.373 R2.2
NetOTCP1_2: OTCP1.2 Q1.3 | length 62
  Top Layer w0.4: v1(71.495,106.285) 71.515,106.265 v1(71.515,85.87)
  Bottom Layer w0.4: OTCP1.2 71.495,117.146 v1(71.495,106.285) ; v1(71.515,85.87) 81.825,75.56 90.94,75.56 92.512,73.988 Q1.3
NetOTCP1_6: OTCP1.6 R1.1 | length 4.5
  Bottom Layer w0.4: R1.1 58.251,121.016 58.936,121.702 OTCP1.6
NetOTCP2_1: OTCP2.1 R8.2 | length 53.8
  Bottom Layer w0.4: OTCP2.1 71.558,95.831 87.485,79.905 107.695,79.905 112.822,74.778 R8.2
NetOTCP2_2: OTCP2.2 Q2.3 | length 40.7
  Bottom Layer w0.4: OTCP2.2 84.131,78.64 96.69,78.64 100.298,75.032 Q2.3
NetOTCP2_6: OTCP2.6 R9.1 | length 4.8
  Bottom Layer w0.4: R9.1 57.856,95.516 58.42,96.08 60.981,96.08 OTCP2.6
NetOTCP3_1: OTCP3.1 R13.2 | length 65.4
  Top Layer w0.4: v1(73.99,68.515) 106.17,36.335 v1(106.17,27.465)
  Bottom Layer w0.4: OTCP3.1@69.479,72.392 70.113,72.392 v1(73.99,68.515) ; v1(106.17,27.465) 110.989,27.465 R13.2
NetOTCP3_2: OTCP3.2 Q3.3 | length 49.4
  Top Layer w0.4: v1(73.82,64.41) 96.595,41.635 v1(96.595,39.19)
  Bottom Layer w0.4: OTCP3.2@69.479,69.852 73.82,65.511 v1(73.82,64.41) ; v1(96.595,39.19) 96.595,37.065 97.473,36.187 Q3.3
NetOTCP3_6: OTCP3.6 R14.1 | length 4.6
  Bottom Layer w0.4: R14.1 57.846,71.606 58.631,72.392 OTCP3.6@61.229,72.392
NetQ4_1: Q4.1 R26.1 | length 2.9
  Bottom Layer w0.4: Q4.1 R26.1@97.801,83.959
NetQ5_1: Q5.1 R27.1 | length 2.8
  Bottom Layer w0.4: Q5.1 R27.1@111.136,83.959
NetQ6_1: Q6.1 R28.1 | length 2.5
  Bottom Layer w0.4: Q6.1 R28.1@123.963,83.959
NetR6_2: R6.2 U1.1 | length 8.4
  Bottom Layer w0.75: U1.1 72.57,55.685 74.384,53.871 R6.2
NUT1: 1.2 H2.2 R36.2 | length 65
  Bottom Layer w0.5: 1.2 131.835,57.805 133.842,59.812 133.842,62.512 133.842,104.135 138.86,109.153 R36.2 143.24,109.214 H2.2
NUT2: 1.3 H3.2 R37.2 | length 50.5
  Top Layer w0.5: v1(135.2,63.08) 135.2,87.791 134.985,88.006 v1(140.765,93.786)
  Bottom Layer w0.5: 1.3 132.674,56.993 135.2,59.519 v1(135.2,63.08) ; v1(140.765,93.786) R37.2 143.24,93.847 H3.2
NUT3: 1.4 H4.2 R38.2 | length 37
  Top Layer w0.5: v1(136.636,59.939) 136.636,74.417 v1(140.765,78.546)
  Bottom Layer w0.5: 1.4 133.283,56.205 136.636,59.558 v1(136.636,59.939) ; v1(140.765,78.546) R38.2 143.24,78.613 H4.2
NUT4: 1.5 H5.2 R39.2 | length 24.5
  Top Layer w0.5: v1(138.033,57.907) 138.033,62.29 v1(140.573,64.83)
  Bottom Layer w0.5: 1.5 134.375,55.392 136.89,57.907 v1(138.033,57.907) ; v1(140.573,64.83) R39.2 143.24,64.897 H5.2
PGC: 1.16 H1.5 | length 17.1
  Bottom Layer w0.5: 1.16 125.104,46.679 126.363,45.42 130.363,45.42 133.715,42.068 H1.5
PGD: 1.17 H1.4 | length 15.9
  Bottom Layer w0.5: 1.17 124.317,46.066 126.188,44.195 129.413,44.195 131.175,42.433 H1.4
PWM: 1.9 R4.1 | length 45.7
  Top Layer w0.5: v1(105.638,61.32) 105.638,58.37 117.838,46.17 129.363,46.17 v1(130.913,47.72)
  Bottom Layer w0.5: R4.1 104.032,62.926 v1(105.638,61.32) ; 1.9 131.291,52.217 132.813,50.695 132.813,49.62 v1(130.913,47.72)
Relay: 1.25 R11.1 | length 28.5
  Top Layer w0.5: v1(109.8,61.09) 109.8,55.883 v1(114.388,51.295)
  Bottom Layer w0.5: v1(109.8,61.09) 110.008,61.09 110.023,61.105 R11.1 ; v1(114.388,51.295) 116.19,51.295 117.051,52.156 118.515,52.156 1.25
RELAY2: BT2.1 C6.2 R12.2 T1.6 | length 38
  Bottom Layer w0.4: R12.2 41.351,92.339 42.684,91.005 BT2.1@45.21,91.005
  Bottom Layer w2: T1.6 28.67,78.63 C6.2 36.58,78.63 45.272,87.322 BT2.1
SHCP: 1.36 U2.11 U4.11 | length 91.7
  Top Layer w0.5: v1(81.23,115.38) 81.23,115.087 78.388,112.245 78.388,100.595 80.788,98.195 v1(80.788,95.807) 83.738,92.857 83.738,87.845 91.738,79.845 115.263,79.845 121.913,73.195 v1(121.913,62.795)
  Bottom Layer w0.5: v1(80.788,95.807) U4.11 ; v1(81.23,115.38) 81.295,115.315 U2.11 ; v1(121.913,62.795) 121.913,60.362 1.36
STCP: 1.37 U2.12 U4.12 | length 122.7
  Top Layer w0.5: v1(77.963,116.645) 76.263,114.945 76.263,99.345 v1(78.138,97.47) 78.138,89.17 90.238,77.07 113.563,77.07 118.688,71.945 118.688,62.195 121.788,59.095 129.638,59.095 130.238,59.695 130.238,61.495 127.313,64.42 v1(124.838,64.42)
  Bottom Layer w0.5: v1(77.963,116.645) 82.822,116.645 U2.12 ; v1@78.138,97.595 v1(78.138,97.47) 78.531,97.077 U4.12 ; 1.37 122.717,61.699 123.538,62.52 123.538,63.12 v1(124.838,64.42)
Van: 1.22 R16.1 | length 26.1
  Bottom Layer w0.5: R16.1 100.003,42.737 102.473,45.207 118.983,45.207 120.329,46.553 1.22
VAN2: BT3.1 C7.2 R17.2 T1.8 | length 40
  Bottom Layer w2: T1.8 24.506,69.126 R17.2 42.206,67.566 BT3.1 33.9,56.193 C7.2
zero: 1.8 R7.1 U1.4 | length 96.6
  Top Layer w0.5: v1(83.338,64.295) 89.888,64.295 104.138,50.045 112.138,50.045 117.263,44.92 130.863,44.92 v1(132.638,46.695)
  Bottom Layer w0.5: U1.4 60.885,57.655 62.595,59.365 R7.1 81.715,62.663 83.338,64.285 v1(83.338,64.295) ; 1.8 131.828,53.005 133.55,51.284 133.55,51.213 133.813,50.95 133.813,47.87 v1(132.638,46.695)
pads on no net: 1.1 1.10 1.11 1.12 1.13 1.14 1.15 1.19 1.20 1.21 1.23 1.24 1.26 1.27 1.32 1.33 1.34 1.38 1.39 1.40 1.41 H1.6 L1.6 L2.6 OTCP1.3 OTCP1.5 OTCP2.3 OTCP2.5 OTCP3.3 OTCP3.5 U3.0 U4.9 Y1.0
copper on no net:
  other v2: 8.08,22.7 147.08,22.7 8.08,129.7 147.08,129.7

## Polygon pours and split planes (outlines as drawn)
GND on Bottom Layer "bot" (solid, remove dead copper, pour order 0): 65.37,133.7 151.08,133.7 151.08,18.7 65.37,18.7
GND on Top Layer "top" (solid, remove dead copper, pour order 2): 65.38,133.7 151.08,133.7 151.08,18.7 65.42,18.7

## Keep-outs
Keep-Out Layer:
  lines w1: 4.08,18.7 4.08,133.7 151.08,133.7 151.08,18.7 4.08,18.7

## Other copper
Bottom Layer:
  text "Designed by INT" at 7.7,41.15 h2 r270

## Dimensions
4.08,133.7 to 4.08,18.7 on Mechanical 10
4.08,133.7 to 151.08,133.7 on Mechanical 10

## Text inside footprints (layer, text, board x,y; h text height)
L1: Top Overlay "1" at 99.683,108.986 h1
L2: Top Overlay "1" at 99.683,89.478 h1